# Altium PCB PCB1.PcbDoc
Units mil, origin at the board's own origin, x right, y up, seen from the top; angles counter-clockwise.
Board outline 3124.03 x 2194.03 mil, 2 copper layers (Top Layer, Bottom Layer); 12 components, 37 nets, 123 pads, 2 vias.
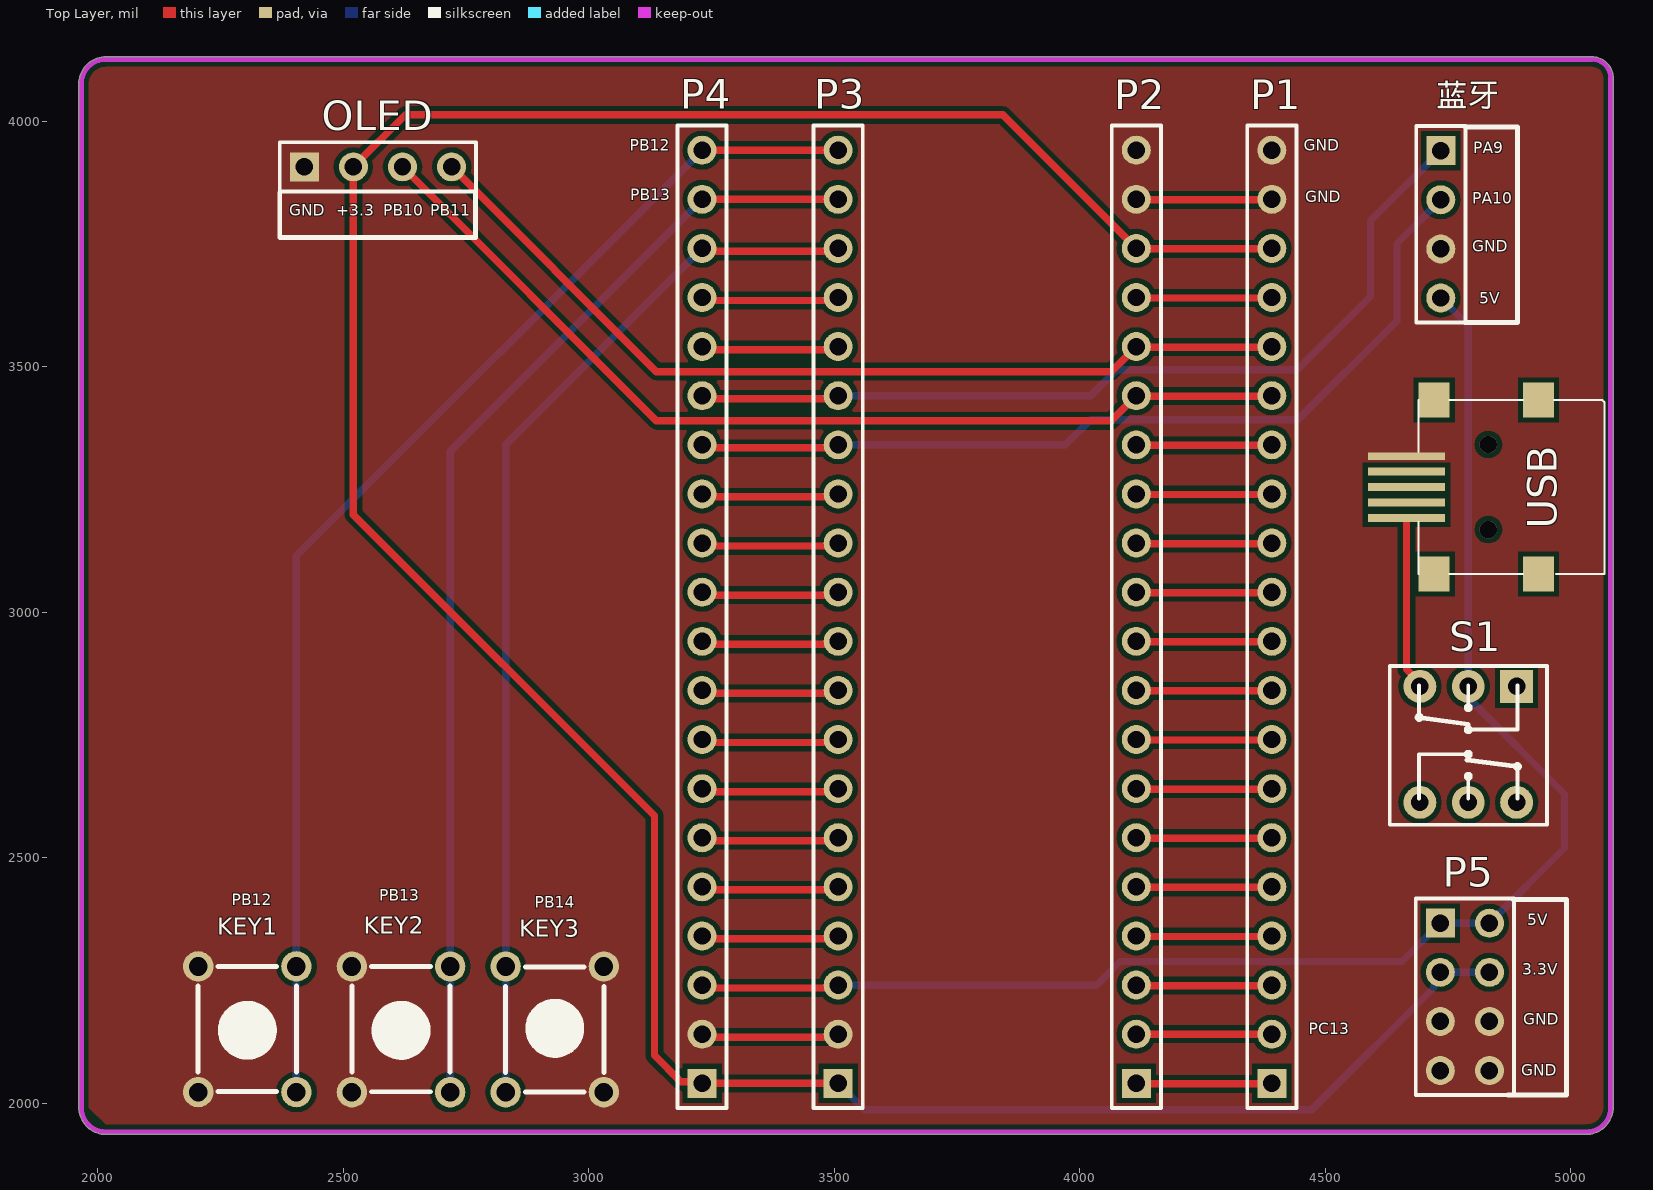
[diagram p0: Top Layer view]
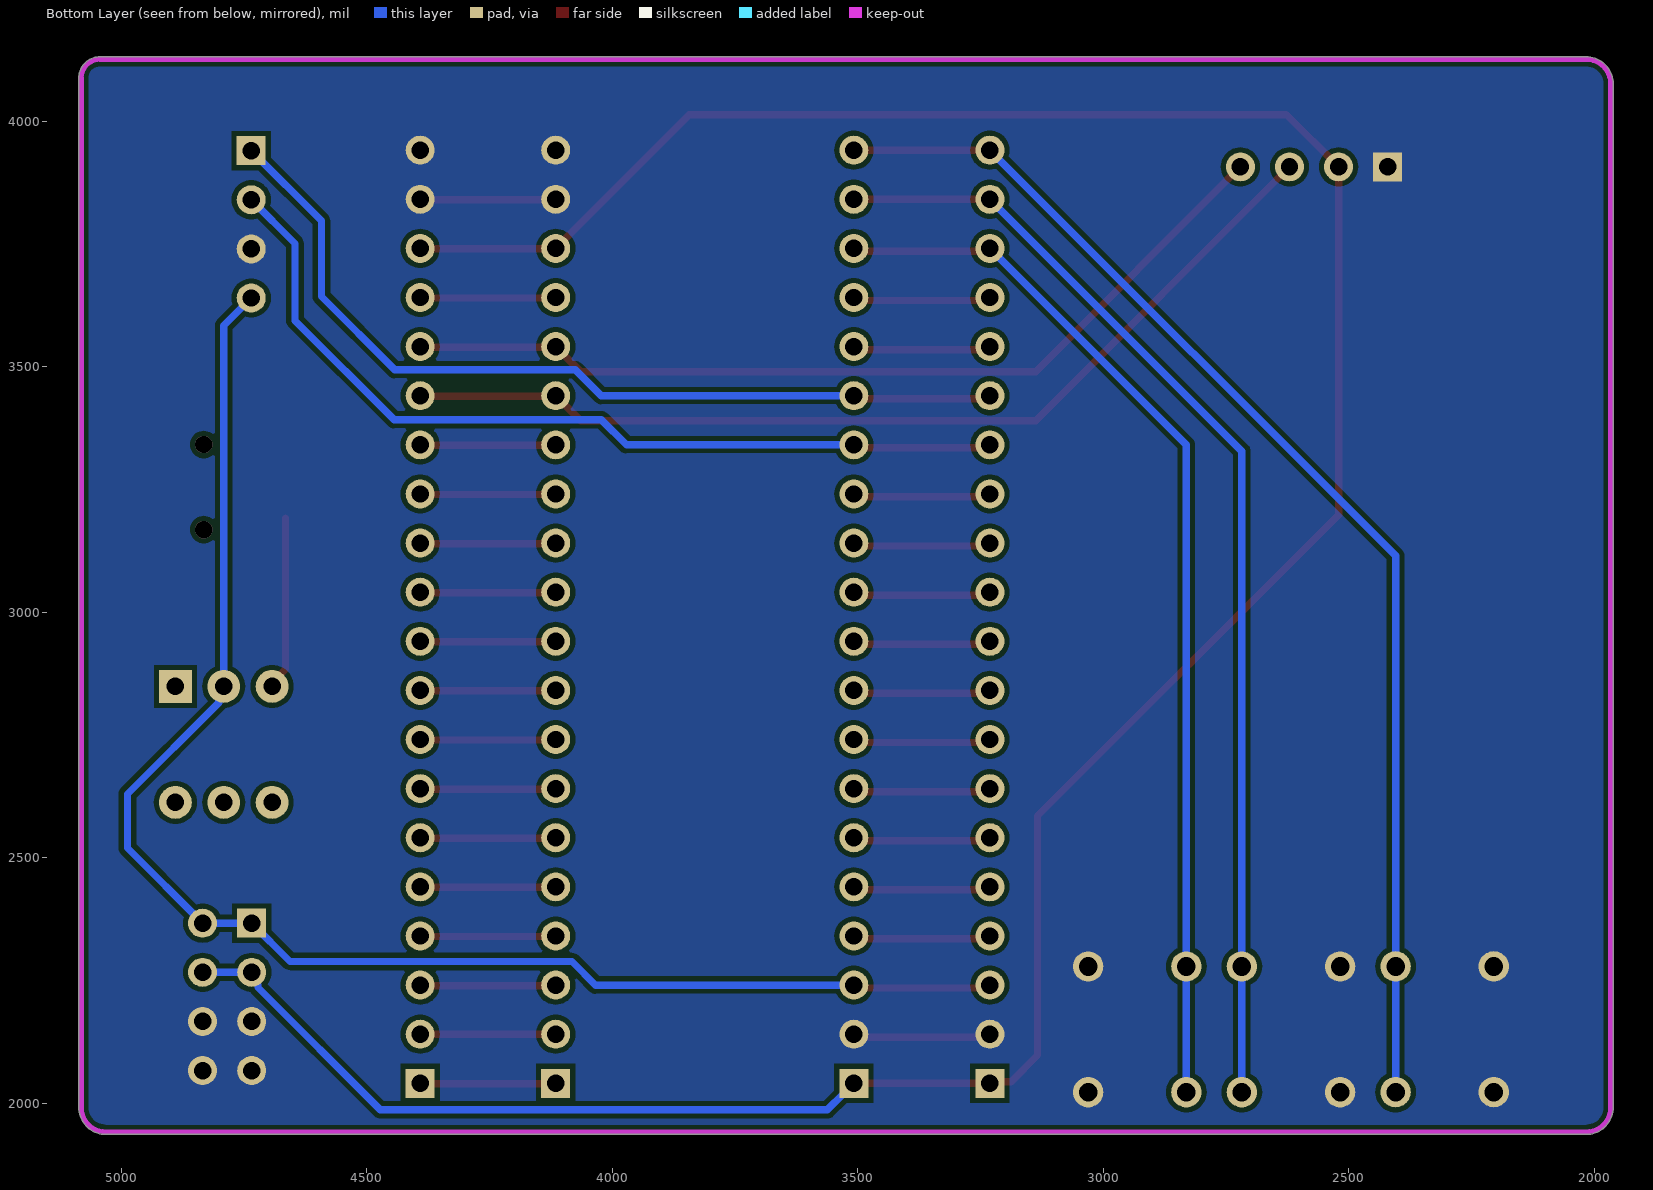
[diagram p1: Bottom Layer view, seen from below]

## Layer stack, top to bottom
Top Solder: solder mask 0.4, Solder Resist, Dk 3.5
Top Layer: signal copper 1.4
Dielectric 1: dielectric 12.6, FR-4, Dk 4.8
Bottom Layer: signal copper 1.4
Bottom Solder: solder mask 0.4, Solder Resist, Dk 3.5

## Board outline
1961.98,1992 1961.98,4076 cw(c2017,4076) 2017,4131.02 5043,4131.02 cw(c5043,4088) 5086.02,4088 5086.02,1992 cw(c5031,1992) 5031,1936.98 2017,1936.98 cw(c2017,1992)

## Design rules (kind name [scope] priority, off if disabled: settings)
Clearance [All] p1: gap=10 ignorepadtopadclearanceinfootprint=TRUE except(0: Arc-Hole Track-Hole SMDPad-Hole THPad-Hole Via-Hole Fill-Hole Poly-Hole Region-Hole Text-Hole)
PlaneConnect [All] p1: planeconnectstyle=Direct reliefexpansion=20 reliefentries=4 reliefconductorwidth=10 reliefairgap=10
PolygonConnect [All] p1: connectstyle=Direct reliefconductorwidth=10 reliefentries=4 polygonreliefangle="90 Angle" airgapwidth=10
RoutingVias [All] p1: holewidth=28 width=50 viastyle="Through Hole" minholewidth=28 minwidth=50 maxholewidth=28 maxwidth=50
SolderMaskExpansion [All] p1: expansion=4 istentingtop=FALSE
Width [All] p1: maxlimit=20 minlimit=10 preferedwidth=15
29 further rules are at their usual default settings.

## Components (designator, comment, footprint, x,y, rotation, side; value= is the part's Value field where it differs from the comment)
KEY1 "KEY_M" KEY_M 2405,2279 r270 top
KEY2 "KEY_M" KEY_M 2718,2278.91 r270 top
KEY3 "KEY_M" KEY_M 2831,2023 r90 top
OLED "Header 4" HDR1X4 2421,3907 r0 top (schematic designator P7)
P1 "Header 20" HDR1X20 4391,2041 r90 top
P2 "Header 20" HDR1X20 4115,2041 r90 top
P3 "Header 20" HDR1X20 3508,2041 r90 top
P4 "Header 20" HDR1X20 3231,2041 r90 top
P5 "Header 4X2" HDR2X4 4734,2367 r270 top
S1 "SW DIP-3" "KFT DIP-8X8" 4791,2731 r180 top
USB "USB" "USB_MINI - duplicate" 5068,3255 r180 top
蓝牙 "Header 4" HDR1X4 4735,3940 r270 top (schematic designator P6)

## Footprints (in the part's own frame and the unit in brackets; to place one, negate y for a bottom-side part, rotate by r counter-clockwise, add the part's x,y. Pads: shape width x height; smd on the part's side, far side on the other; paste and mask are expansions set on the pad)
HDR1X4 [mm] "Connector; Header; 4 Position"
  rect 1.5x1.5 hole 0.9: 1(0,0)
  round 1.5 hole 0.9: 2(2.54,0) 3(5.08,0) 4(7.62,0)
  silkscreen extent -1.27,-1.27 8.89,1.27
HDR1X20 [mm] "Connector; Header; 20 Position"
  rect 1.5x1.5 hole 0.9: 1(0,0)
  round 1.5 hole 0.9: 2(2.54,0) 3(5.08,0) 4(7.62,0) 5(10.16,0) 6(12.7,0) 7(15.24,0) 8(17.78,0) 9(20.32,0) 10(22.86,0) 11(25.4,0) 12(27.94,0) 13(30.48,0) 14(33.02,0) 15(35.56,0) 16(38.1,0) 17(40.64,0) 18(43.18,0) 19(45.72,0) 20(48.26,0)
  silkscreen extent -1.27,-1.27 49.53,1.27
HDR2X4 [mm] "Connector; Header; 4x2 Position"
  rect 1.5x1.5 hole 0.9: 1(0,0)
  round 1.5 hole 0.9: 2(0,2.54) 3(2.54,0) 4(2.54,2.54) 5(5.08,0) 6(5.08,2.54) 7(7.62,0) 8(7.62,2.54)
  silkscreen extent -1.27,-1.27 8.89,3.81
KEY_M [mil]
  round 62 hole 38: 1(0,0) 1(255.91,0) 2(0,-200) 2(255.91,-200)
  silkscreen extent 0,-200 255,0
"KFT DIP-8X8" [mm] "自锁开关，规格：8*8mm"
  rect 1.7x1.7 hole 0.9: 1(-2.5,-3)
  round 1.7 hole 0.9: 2(0,-3) 3(2.5,-3) 4(2.5,3) 5(0,3) 6(-2.5,3)
  silkscreen extent -4.06,-4.06 4.06,4.15, body extent -3.95,-3.95 4.05,4.05, height 13.1
"USB_MINI - duplicate" [mm]
  rect 1.6x1.8 smd: 0(3.4,4.5) 0(3.4,-4.5) 0(8.8,-4.5) 0(8.8,4.5)
  rect 4x0.4 smd: 1(10.227,1.6) 2(10.227,0.8) 3(10.227,0) 4(10.227,-0.8) 5(10.227,-1.6)
  silkscreen extent 0,-4.5 9.6,4.5

## Part data
OLED 蓝牙: "Header, 4-Pin", LatestRevisionDate=17-Jul-2002, LatestRevisionNote="Re-released for DXP Platform.", Publisher="Altium Limited"
P1 P2 P3 P4: "Header, 20-Pin", LatestRevisionDate=17-Jul-2002, LatestRevisionNote="Re-released for DXP Platform.", Publisher="Altium Limited"
P5: "Header, 4-Pin, Dual row", LatestRevisionDate=17-Jul-2002, LatestRevisionNote="Re-released for DXP Platform.", Publisher="Altium Limited"
S1: "DIP Switch, 3 Position, SPST", Code_JEDEC=MO-001-AM, LatestRevisionDate=17-Jul-2002, LatestRevisionNote="Re-released for DXP Platform.", PackageReference=DIP-6, Published=24-Mar-1999, Publisher="Altium Limited"
USB: library part USB5

## Via types
v1: diameter 35.43, hole 35.43, Top Layer to Bottom Layer, 2 vias

## Nets (pads, with @x,y where several pads share a name; then routed paths per layer and width w, separated by ;. In a path a pad name is that pad's centre, name@x,y a point inside that pad or via, vN(x,y) a via of type N, cw(c..) or ccw(c..) an arc to the next point about the centre after c; other vN are vias at no path point)
+3.3V: OLED.2 P1.18 P2.18 P3.1 P4.1 P5.3 P5.4 | length 5962
  Top Layer w15: P3.1 P4.1 3227.76,2044.24 3187.76,2044.24 3134,2098 3134,2586 2521,3199 OLED.2 2627,4013 3843,4013 P2.18 ; P2.18@4107.56,3739.99 P1.18@4383.56,3739.99
  Bottom Layer w15: P3.1 3530.03,2018.97 3562,1987 4472,1987 4721.21,2236.21 4721.21,2242.29 4734,2255.08 P5.3 P5.4
+5V: P3.3 P4.3 P5.1 P5.2 S1.2 蓝牙.4 | length 3101.1
  Top Layer w15: P4.3@3234.56,2234.99 P3.3@3510.56,2234.99
  Bottom Layer w15: P3.3 4034,2241 4082,2289 4656,2289 P5.1 P5.2 4987,2520 4987,2630 4800.94,2816.06 4800.94,2839.17 S1.2 ; 蓝牙.4 4791,3584 S1.2@4791,2843
GND: KEY1.2 KEY2.2 KEY3.2 OLED.1 P1.19 P1.20 P2.19 P2.20 P3.2 P4.2 P5.5 P5.6 P5.7 P5.8 USB.5 蓝牙.3 | length 552
  Top Layer w15: P4.2@3234.56,2134.99 P3.2@3510.56,2134.99 ; P2.19@4107.56,3839.99 P1.19@4383.56,3839.99
NetP1_17: P1.17 P2.17 | length 276
  Top Layer w15: P2.17@4107.56,3639.99 P1.17@4383.56,3639.99
NetS1_3: S1.3 USB.1 | length 354.2
  Top Layer w15: USB.1 4665.35,2883.86 4692.57,2856.64 S1.3
PA0: P1.5 P2.5 | length 276
  Top Layer w15: P2.5@4107.56,2439.99 P1.5@4383.56,2439.99
PA1: P1.6 P2.6 | length 276
  Top Layer w15: P2.6@4107.56,2539.99 P1.6@4383.56,2539.99
PA2: P1.7 P2.7 | length 276
  Top Layer w15: P2.7@4107.56,2639.99 P1.7@4383.56,2639.99
PA3: P1.8 P2.8 | length 276
  Top Layer w15: P2.8@4107.56,2739.99 P1.8@4383.56,2739.99
PA4: P1.9 P2.9 | length 276
  Top Layer w15: P2.9@4107.56,2839.99 P1.9@4383.56,2839.99
PA5: P1.10 P2.10 | length 276
  Top Layer w15: P2.10@4107.56,2939.99 P1.10@4383.56,2939.99
PA6: P1.11 P2.11 | length 276
  Top Layer w15: P2.11@4107.56,3039.99 P1.11@4383.56,3039.99
PA7: P1.12 P2.12 | length 276
  Top Layer w15: P2.12@4107.56,3139.99 P1.12@4383.56,3139.99
PA8: P3.16 P4.16 | length 276
  Top Layer w15: P4.16@3234.56,3534.99 P3.16@3510.56,3534.99
PA9: P3.15 P4.15 蓝牙.1 | length 1799.9
  Top Layer w15: P4.15@3234.56,3434.99 P3.15@3510.56,3434.99
  Bottom Layer w15: P3.15 4022,3441 4074.97,3493.97 4410.48,3493.97 ; 4410.51,3494 4443,3494 4592,3643 4592,3797 蓝牙.1
PA10: P3.14 P4.14 蓝牙.2 | length 1801.7
  Top Layer w15: P4.14@3234.56,3334.99 P3.14@3510.56,3334.99
  Bottom Layer w15: P3.14 3971,3341 4022,3392 4444,3392 4646,3594 4646,3751 蓝牙.2
PA11: P3.13 P4.13 | length 276
  Top Layer w15: P4.13@3234.56,3234.99 P3.13@3510.56,3234.99
PA12: P3.12 P4.12 | length 276
  Top Layer w15: P4.12@3234.56,3134.99 P3.12@3510.56,3134.99
PA15: P3.11 P4.11 | length 276
  Top Layer w15: P4.11@3234.56,3034.99 P3.11@3510.56,3034.99
PB0: P1.13 P2.13 | length 276
  Top Layer w15: P2.13@4107.56,3239.99 P1.13@4383.56,3239.99
PB1: P1.14 P2.14 | length 276
  Top Layer w15: P2.14@4107.56,3339.99 P1.14@4383.56,3339.99
PB3: P3.10 P4.10 | length 276
  Top Layer w15: P4.10@3234.56,2934.99 P3.10@3510.56,2934.99
PB4: P3.9 P4.9 | length 276
  Top Layer w15: P4.9@3234.56,2834.99 P3.9@3510.56,2834.99
PB5: P3.8 P4.8 | length 276
  Top Layer w15: P4.8@3234.56,2734.99 P3.8@3510.56,2734.99
PB6: P3.7 P4.7 | length 276
  Top Layer w15: P4.7@3234.56,2634.99 P3.7@3510.56,2634.99
PB7: P3.6 P4.6 | length 276
  Top Layer w15: P4.6@3234.56,2534.99 P3.6@3510.56,2534.99
PB8: P3.5 P4.5 | length 276
  Top Layer w15: P4.5@3234.56,2434.99 P3.5@3510.56,2434.99
PB9: P3.4 P4.4 | length 276
  Top Layer w15: P4.4@3234.56,2334.99 P3.4@3510.56,2334.99
PB10: OLED.3 P1.15 P2.15 | length 1998.8
  Top Layer w15: OLED.3 3138,3390 4064,3390 P2.15@4113.99,3439.99 ; P2.15 P2.15@4113.99,3439.99 ; P1.15@4383.56,3439.99 P2.15@4113.99,3439.99
PB11: OLED.4 P1.16 P2.16 | length 1857.4
  Top Layer w15: OLED.4 3138,3490 4064,3490 P2.16@4113.99,3539.99 ; P2.16 P2.16@4113.99,3539.99 ; P1.16@4383.56,3539.99 P2.16@4113.99,3539.99
PB12: KEY1.1 P3.20 P4.20 | length 2537
  Top Layer w15: P4.20 P3.20
  Bottom Layer w15: KEY1.1@2405,2023.09 2405,2279 2405,3115 P4.20
PB13: KEY2.1 P3.19 P4.19 | length 2307.5
  Top Layer w15: P4.19 P3.19
  Bottom Layer w15: KEY2.1@2718,2023 2718,2278.91 2718,3328 P4.19
PB14: KEY3.1 P3.18 P4.18 | length 2159.7
  Top Layer w15: P4.18@3234.56,3734.99 P3.18@3510.56,3734.99
  Bottom Layer w15: KEY3.1@2831,2023 2831,2278.91 2831,3341 P4.18
PB15: P3.17 P4.17 | length 276
  Top Layer w15: P4.17@3234.56,3634.99 P3.17@3510.56,3634.99
PC13: P1.2 P2.2 | length 276
  Top Layer w15: P2.2 P1.2
PC14: P1.3 P2.3 | length 276
  Top Layer w15: P2.3@4107.56,2239.99 P1.3@4383.56,2239.99
PC15: P1.4 P2.4 | length 276
  Top Layer w15: P2.4@4107.56,2339.99 P1.4@4383.56,2339.99
pads on no net: P1.1 P2.1 S1.1 S1.4 S1.5 S1.6 USB.0 USB.2 USB.3 USB.4
copper on no net: | length 276
  Top Layer w15: 4107.56,2039.99 4383.56,2039.99
  other v1: 4831.78,3168.39 4831.78,3341.61

## Polygon pours and split planes (outlines as drawn)
GND on Bottom Layer "Top Layer-No Net" (solid, remove dead copper, pour order 1): 1878,4183 5305,4183 5305,1788 1878,1788
GND on Top Layer "GND_L01_P002" (solid, pour order 2): 1974,4122 5047,4122 5081,4088 5075,4082 5075,1957 2017,1957 1961,2013 1965,2017 1965,4124

## Keep-outs
Keep-Out Layer:
  lines w10: 5081,3970 5081,4088 ; 5081,4088 ccw(c5043,4088) 5043,4126 4977,4126 2291,4126 2017,4126 ccw(c2017,4076) 1967,4076 1967,1992 ccw(c2017,1992) 2017,1942 5031,1942 ccw(c5031,1992) 5081,1992 5081,2004 5081,4088

## Silkscreen, mask and mechanical layers (free items; w line width, h text height)
Top Overlay:
  lines w10: 2371,3855 2371,3763 2770,3763 2770,3857 ; 4784,3590 4891,3590 4891,3988 4784,3988 ; 4872,2017 4991,2017 4991,2415 4882,2415
  text "PB12" at 3084,3932 h40
  text "GND" at 4456,3931.44 h40
  text "PA9" at 4801,3926.44 h40
  text "PB13" at 3085,3830.44 h40
  text "GND" at 4459,3826.44 h40
  text "PA10" at 4799,3823.44 h40
  text "GND" at 2390,3799.11 h40
  text "+3.3" at 2485.67,3799.44 h40
  text "PB10" at 2581.33,3799.44 h40
  text "PB11" at 2677,3799.44 h40
  text "GND" at 4799,3725.89 h40
  text "5V" at 4813,3620.44 h40
  text "PB13" at 2574,2404.44 h40
  text "PB12" at 2273,2395 h40
  text "PB14" at 2890,2390 h40
  text "5V" at 4911,2354.44 h40
  text "3.3V" at 4901,2253.44 h40
  text "GND" at 4903,2152.44 h40
  text "PC13" at 4466,2132.44 h40
  text "GND" at 4899,2048.44 h40
Mechanical 1:
  lines w10: 5081,3970 5081,4088 ; 5081,4088 ccw(c5043,4088) 5043,4126 4977,4126 2291,4126 2017,4126 ccw(c2017,4076) 1967,4076 1967,1992 ccw(c2017,1992) 2017,1942 5031,1942 ccw(c5031,1992) 5081,1992 5081,2004 5081,4088